# EAGLE board untitled (EAGLE 9.6.2)
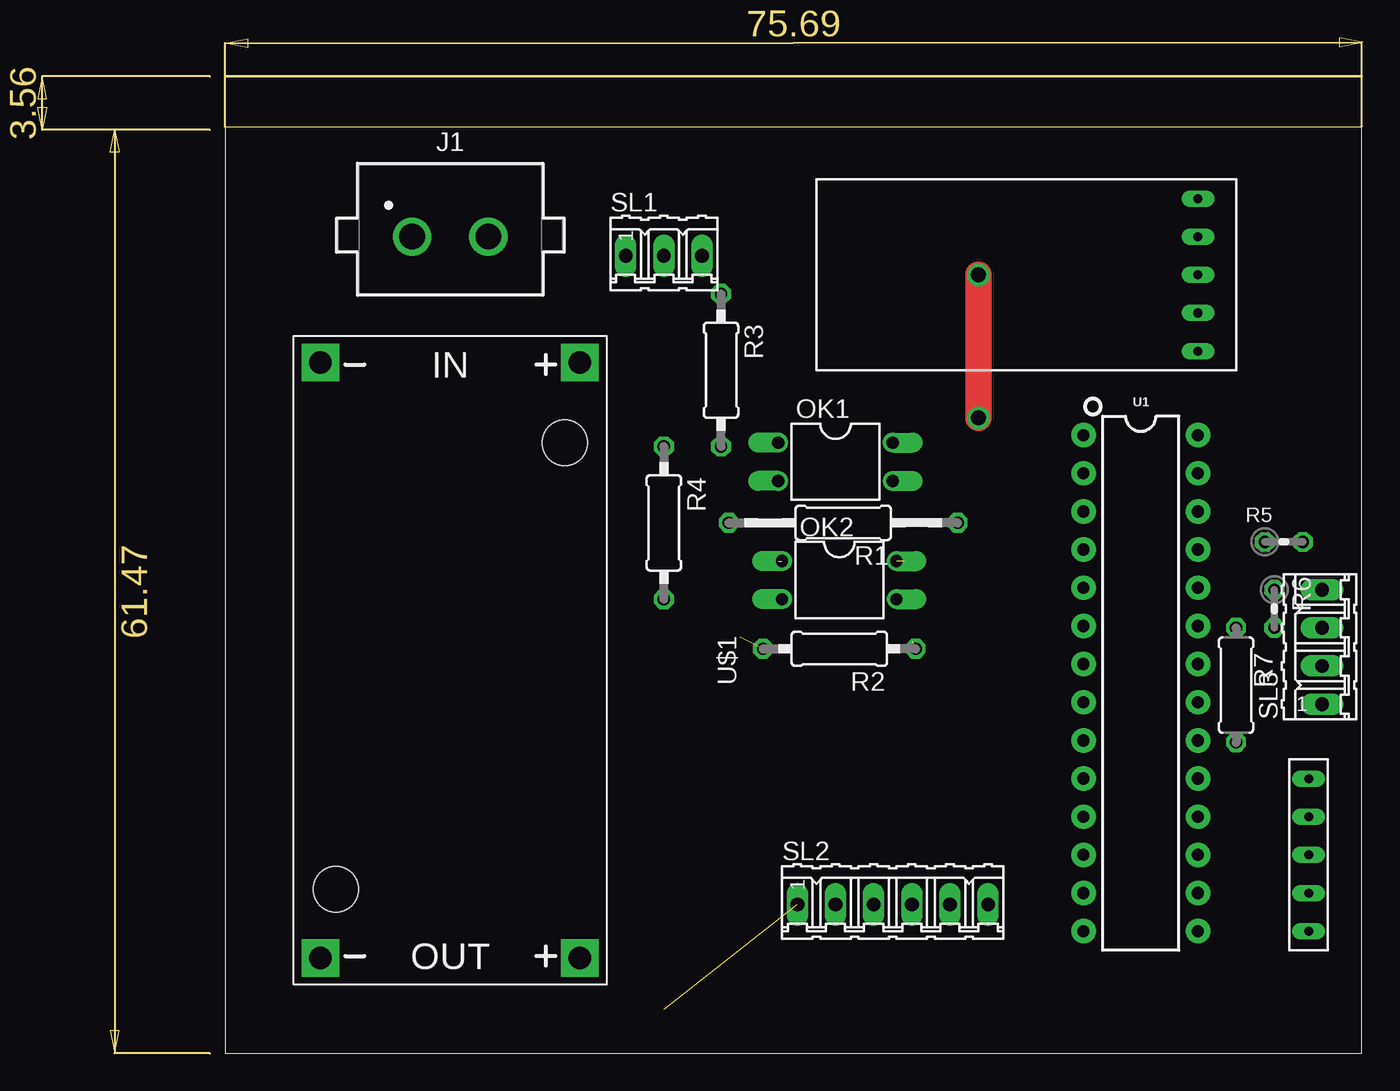
[diagram p0: board, top side]
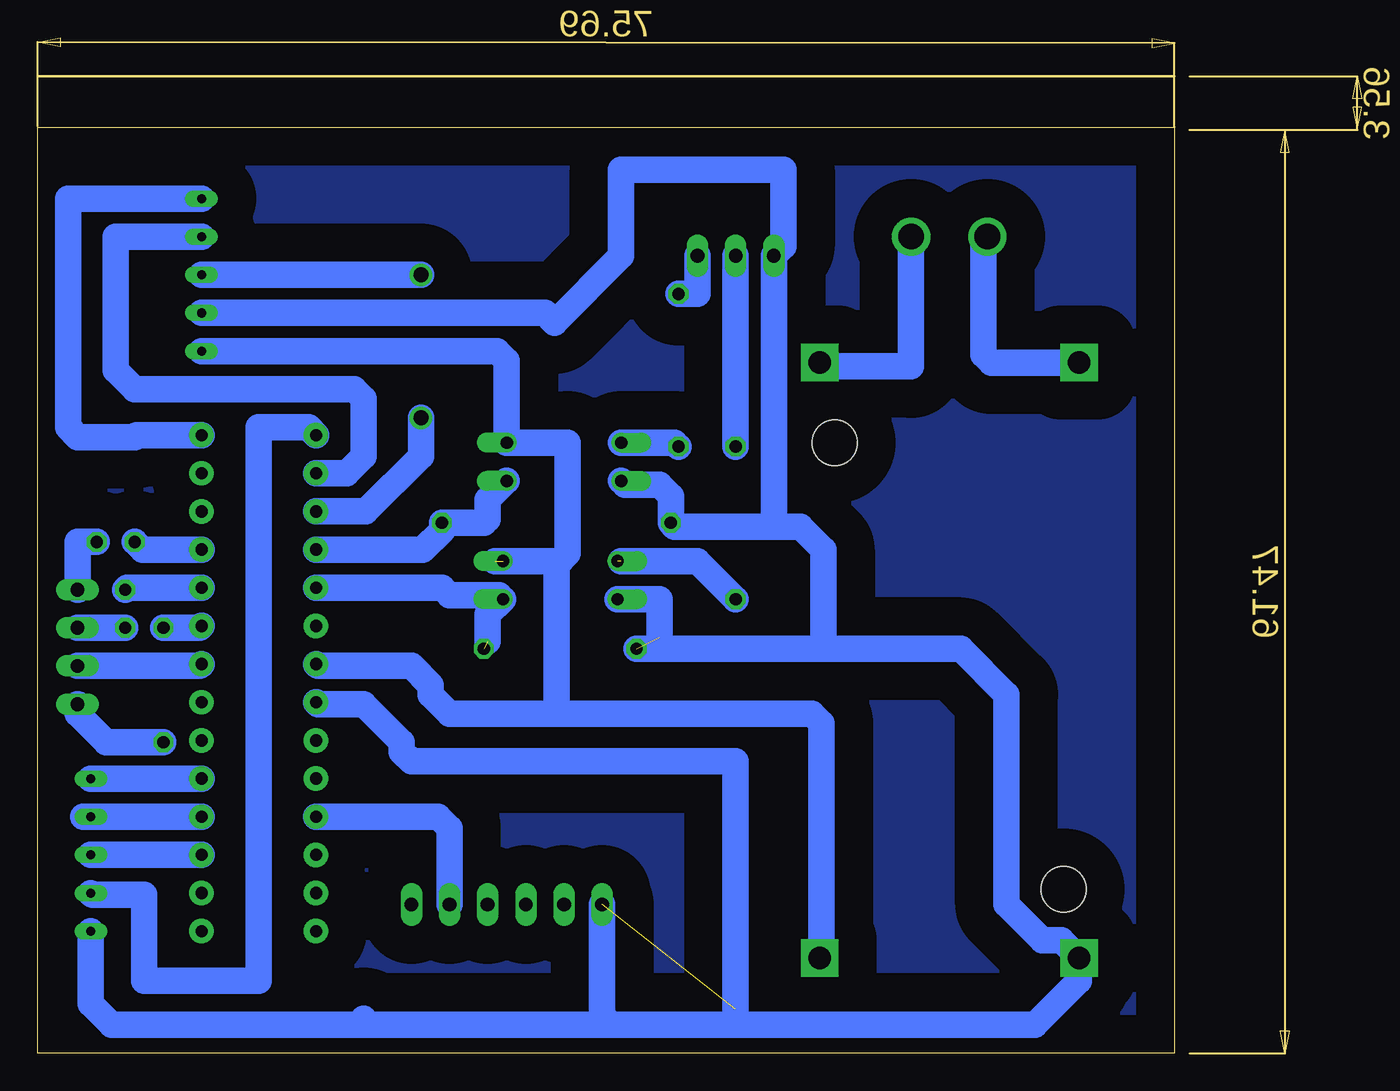
[diagram p1: board, bottom side, seen from below]

Size 75.69 x 65.02 mm. Coordinates in mm from the lower left corner, seen from the top.
Outline: 0,65.02 75.69,65.02
Outline: 0,0 75.67,0 75.67,61.65 0,61.65 0,0
Copper layers (1*16): Top 0.035mm / dielectric 1.5mm / Bottom 0.035mm
Design rules "default *": minimum track width 6mil, minimum drill 0.35mm, track to track 25mil, track to pad 25mil, pad to pad 25mil, via to via 25mil, smd to smd 6mil, copper to edge 40mil, drill to drill 6mil, minimum pad ring 10mil, minimum via ring 8mil, stop-mask expansion 4mil, vias tented up to drill 0mil, thermal gap 10mil

## Footprints (pad centres in the part's own frame; a part is rotated, then mirrored left to right if it is on the bottom)
691305530002 = drill 1.7: 1 -2.54,0; 2 2.54,0
DIL04 = drill 0.813 offset: 1 -1.27,-3.81; 2 1.27,-3.81; 3 1.27,3.81; 4 -1.27,3.81
0207/15 = drill 0.813 octagon: 1 -7.62,0; 2 7.62,0
0207/10 = drill 0.813 octagon: 1 -5.08,0; 2 5.08,0
0204V = drill 0.813 octagon: 1 -1.27,0; 2 1.27,0
0207/7 = drill 0.813 octagon: 1 -3.81,0; 2 3.81,0
03P = drill 0.914 long: 1 -2.54,0; 2 0,0; 3 2.54,0
06P = drill 0.914 long: 1 -6.35,0; 2 -3.81,0; 3 -1.27,0; 4 1.27,0; 5 3.81,0; 6 6.35,0
04P = drill 0.914 long: 1 -3.81,0; 2 -1.27,0; 3 1.27,0; 4 3.81,0
DIP28 = drill 0.813 pad 1.626: 1 -16.51,-3.81; 2 -13.97,-3.81; 3 -11.43,-3.81; 4 -8.89,-3.81; 5 -6.35,-3.81; 6 -3.81,-3.81; 7 -1.27,-3.81; 8 1.27,-3.81; 9 3.81,-3.81; 10 6.35,-3.81; 11 8.89,-3.81; 12 11.43,-3.81; 13 13.97,-3.81; 14 16.51,-3.81; 15 16.51,3.81; 16 13.97,3.81; 17 11.43,3.81; 18 8.89,3.81; 19 6.35,3.81; 20 3.81,3.81; 21 1.27,3.81; 22 -1.27,3.81; 23 -3.81,3.81; 24 -6.35,3.81; 25 -8.89,3.81; 26 -11.43,3.81; 27 -13.97,3.81; 28 -16.51,3.81
DC-DC-STEP-DOWN-LM2596 = drill 1.5 pad 2.5 square: IN+ -19.812,8.636; IN- -19.812,-8.636; OUT+ 19.812,8.636; OUT- 19.812,-8.636 | hole 3: -14.478,7.62; 15.24,-7.62
MYISP = drill 0.6 long: P$1 0,5.08; P$2 0,2.54; P$3 0,0; P$4 0,-2.54; P$5 0,-5.08
HC12 = drill 0.6 long: P$1 5.08,5.08; P$2 5.08,2.54; P$3 5.08,0; P$4 5.08,-2.54; P$5 5.08,-5.08

## Placement (x,y rotation side)
J1  [691305530002]  14.99,54.36 0 top
OK1  PC817  [DIL04]  40.64,39.37 270 top
OK2  PC817  [DIL04]  40.89,31.5 270 top
R1  [0207/15]  41.15,35.31 180 top
R2  [0207/10]  40.89,26.92 180 top
R3  [0207/10]  33.02,45.47 270 top
R4  [0207/10]  29.21,35.31 270 top
R5  [0204V]  70.48,34.04 0 top
R6  [0204V]  69.85,29.59 270 top
R7  [0207/7]  67.31,24.51 270 top
SL1  [03P]  29.21,53.09 0 top
SL2  [06P]  44.45,9.91 0 top
SL3  [04P]  73.03,27.05 90 top
U1  328P  [DIP28]  60.96,24.64 270 top
U$1  DC-DC-STEP-DOWN-LM2596  [DC-DC-STEP-DOWN-LM2596]  14.99,26.16 270 top
U$2  [MYISP]  72.14,13.21 0 top
U$3  HC12  [HC12]  59.69,51.82 0 top

## Library data of the parts
J1 = Wurth_Connectors_WR-TBL Pluggable Connector; DATASHEET-URL: https://www.we-online.com/catalog/datasheet/691305530002.pdf; IR-UL: 16A; MOUNT: THT; PART-NUMBER: 691305530002; PINS: 2; PITCH: 5.08mm; TYPE: Vertical; WORKING-VOLTAGE-UL: 300V (AC)
OK1 OK2 = optocoupler; MPN: PC817X4J000F; OC_FARNELL: 9707727; OC_NEWARK: 97K7059
R1 R3-R7 = BeagleBone_Black_Wireless
R2 = eagle-ltspice; SPICEMODEL: NONE; SPICEPREFIX: R
SL1-SL3 = con-amp-quick; OC_FARNELL: unknown; OC_NEWARK: unknown
U1 = SparkFun-IC-Microcontroller; PROD_ID: IC-09136
U$1 = diy-modules
U$2 U$3 = techart

## Nets
GND: OK1.2 OK2.2 R1.2 R2.2 SL1.1 SL2.1 U1.8 U$1.OUT- U$2.P$5 U$3.P$4
INT0: OK1.3 R1.1 U1.4
INT1: OK2.3 R2.1 U1.5
N$1: J1.2 U$1.IN+
N$2: J1.1 U$1.IN-
N$3: U1.19 U$2.P$1
N$4: U1.18 U$2.P$2
N$5: U1.17 U$2.P$3
N$6: U1.1 U$2.P$4
N$7: OK1.1 R3.2
N$8: OK2.1 R4.2
N$9: R3.1 SL1.3
N$10: R4.1 SL1.2
N$11: U1.2 U$3.P$2
N$12: U1.3 U$3.P$3
N$13: SL3.2 U1.22
N$14: R5.1 U1.25
N$15: U1.28 U$3.P$1
N$16: R5.2 SL3.4
N$17: R6.1 U1.24
N$18: R6.2 SL3.3
N$19: R7.1 U1.23
N$20: R7.2 SL3.1
STX: SL2.5 U1.11
VCC: OK1.4 OK2.4 U1.7 U$1.OUT+ U$3.P$5

## Tracks (layer width: path | path; a pad name or v marks a point on that pad's centre or on a via)
GND  (2 unrouted)
  Bottom 1.778: 23.37,26.92 14.22,26.92 11.18,23.88 11.18,9.92 8.78,7.52 7.52,7.52 U$1.OUT- 6.35,4.83 9.27,1.91 37.47,1.91 | 23.37,26.92 R2.2 | 23.37,26.92 23.37,33.53 24.89,35.05 26.67,35.05 | U$2.P$5 72.14,3.3 70.74,1.91 53.98,1.91 | 37.47,1.91 53.98,1.91 | OK1.2 36.58,37.85 34.29,37.85 33.53,37.08 R1.2 33.27,35.05 26.67,35.05 | OK2.2 34.29,30.23 34.29,27.69 | 26.67,35.05 SL1.1 26.04,53.72 26.04,58.8 36.83,58.8 36.83,53.09 41.27,48.64 41.91,49.28 U$3.P$4 | U1.8 57.02,23.24 53.98,23.24 51.44,20.7 51.44,20.07 50.8,19.43 29.21,19.43 29.21,2.92 | 53.98,1.91 53.98,2.29 | SL2.1 38.1,2.54 37.47,1.91
INT0
  Bottom 1.778: OK1.3 45.72,36.83 45.72,35.56 45.97,35.31 48.51,35.31 | U1.4 50.04,33.53 48.77,34.8 48.77,35.05 48.51,35.31 | 48.51,35.31 R1.1
INT1  (1 unrouted)
  Bottom 1.778: U1.5 48.77,30.99 48.26,30.48 44.96,30.48 OK2.3 45.72,29.21 45.72,27.43
N$1
  Bottom 1.778: J1.2 17.53,45.72 23.37,45.72 U$1.IN+
N$2
  Bottom 1.778: U$1.IN- 12.19,45.97 12.7,46.48 12.7,54.61 J1.1
N$3
  Bottom 1.778: U1.19 U$2.P$1
N$4
  Bottom 1.778: U1.18 U$2.P$2 72.64,15.75
N$5
  Bottom 1.778: U1.17 U$2.P$3
N$6
  Bottom 1.778: U1.1 57.66,41.66 60.96,41.66 60.96,4.83 68.58,4.83 68.58,10.54 72.01,10.54 U$2.P$4
N$7
  Bottom 1.778: R3.2 33.27,40.64 OK1.1
N$8  (1 unrouted)
  Bottom 1.778: R4.2 31.75,32.77 36.83,32.77
N$9
  Bottom 1.778: SL1.3 31.75,50.55 R3.1
N$10
  Bottom 1.778: SL1.2 R4.1
N$11
  Bottom 1.778: U1.2 55.12,38.61 53.98,39.75 53.98,43.56 54.61,44.2 69.22,44.2 70.48,45.47 70.48,54.36 U$3.P$2
N$12  (via drill 1)
  Top 1.778: v50.16,51.82 v50.16,42.29
  Bottom 1.778: U1.3 53.85,36.07 50.16,39.75 v50.16,42.29 | U$3.P$3 v50.16,51.82
N$13
  Bottom 1.778: SL3.2 64.9,25.78 U1.22
N$14
  Bottom 1.778: U1.25 68.71,33.53 R5.1
N$15
  Bottom 1.778: U$3.P$1 73.66,56.9 73.66,41.66 73.03,41.02 69.22,41.02 69.09,41.15 U1.28
N$16
  Bottom 1.778: SL3.4 73.03,34.04 R5.2
N$17
  Bottom 1.778: U1.24 69.72,30.99 R6.1
N$18
  Bottom 1.778: R6.2 SL3.3
N$19
  Bottom 1.778: R7.1 64.9,28.32 U1.23
N$20
  Bottom 1.778: R7.2 71.12,20.7 73.03,22.61 SL3.1
N$21
  pour Bottom (isolate 2.54): 0,61.98 75.56,61.98 75.56,0.38 75.56,-0.25 0,-0.25
STX
  Bottom 1.778: SL2.5 48.26,14.99 49.02,15.75 U1.11
VCC  (1 unrouted)
  Bottom 1.778: 41.15,32.51 41.4,32.77 45.21,32.77 | 41.15,22.61 41.15,32.51 | 41.15,32.51 40.39,33.27 40.39,40.64 OK1.4 44.45,46.1 45.09,46.74 U$3.P$5 | U1.7 57.02,25.78 50.8,25.78 49.53,24.51 49.53,23.88 48.26,22.61 41.15,22.61 | 41.15,22.61 24.13,22.61 23.5,21.97 23.5,6.48 U$1.OUT+